# Altium PCB EMI_EMC_PCB1.PcbDoc
Units mil, origin at the board's own origin, x right, y up, seen from the top; angles counter-clockwise.
Board outline 5875 x 3875 mil, 2 copper layers (Top Layer, Bottom Layer); 43 components, 31 nets, 131 pads, 0 vias.
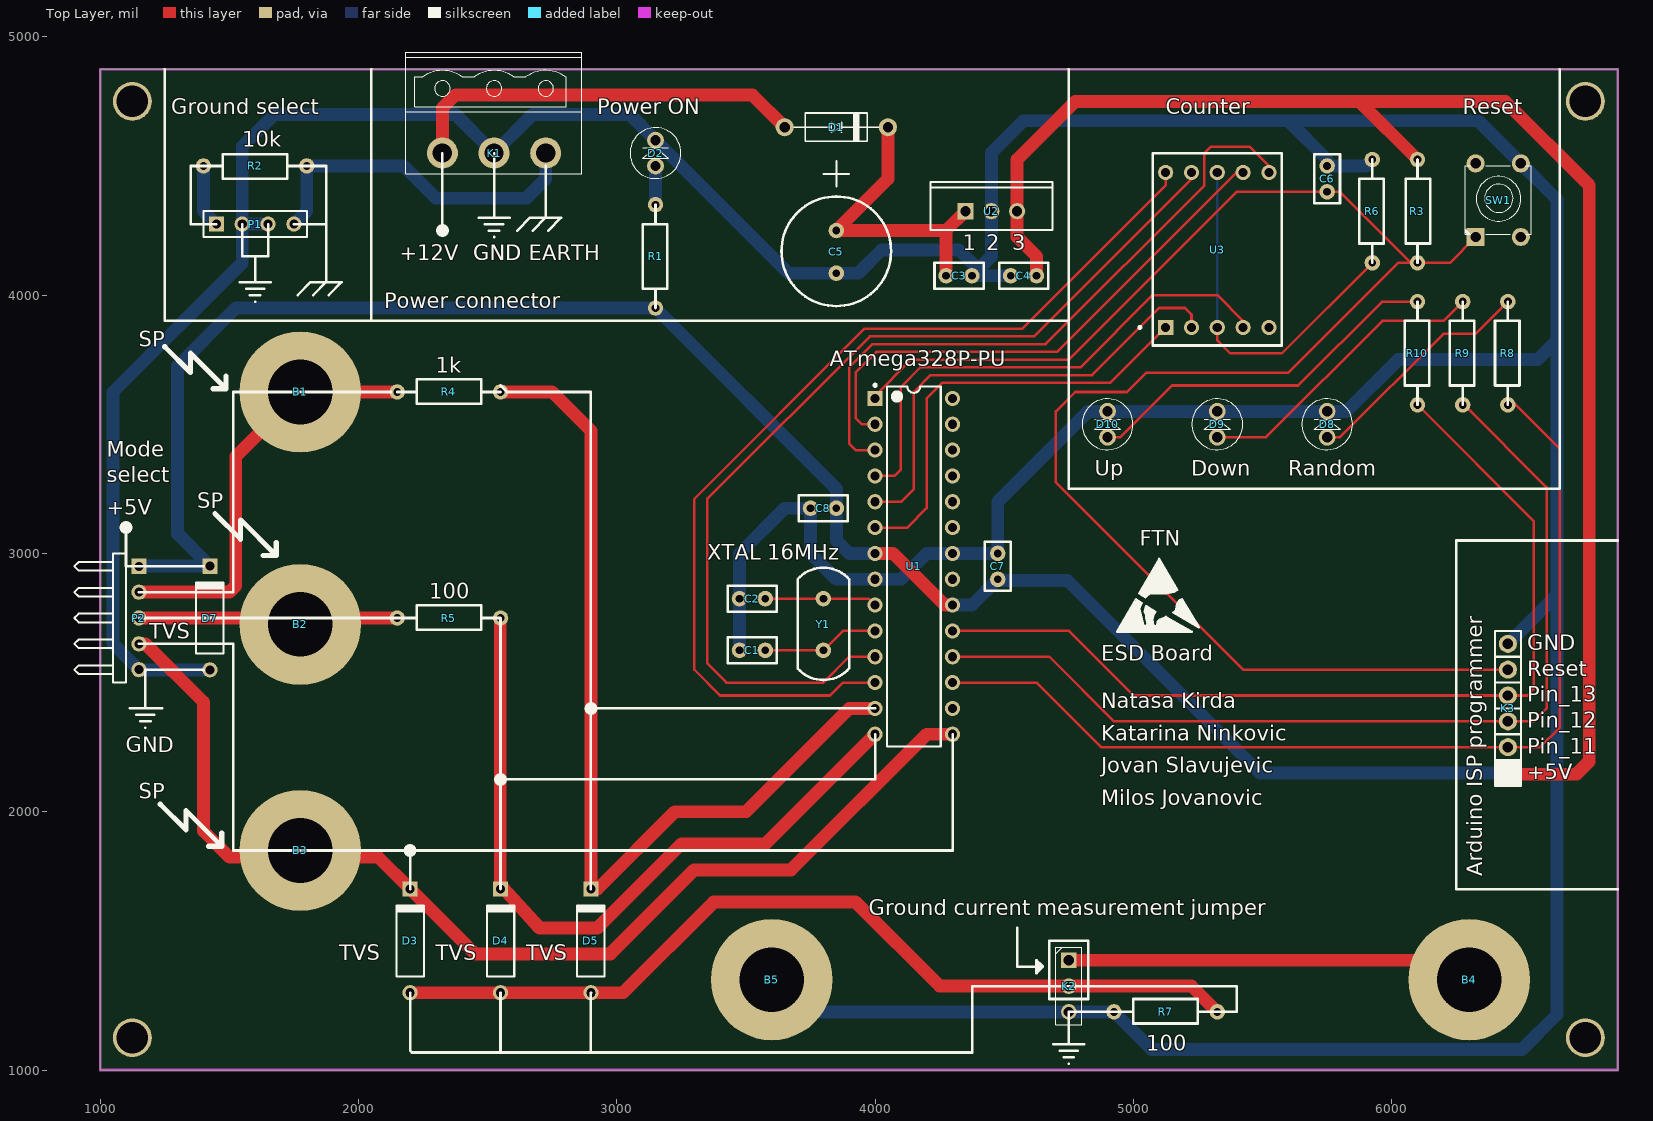
[diagram p0: Top Layer view]
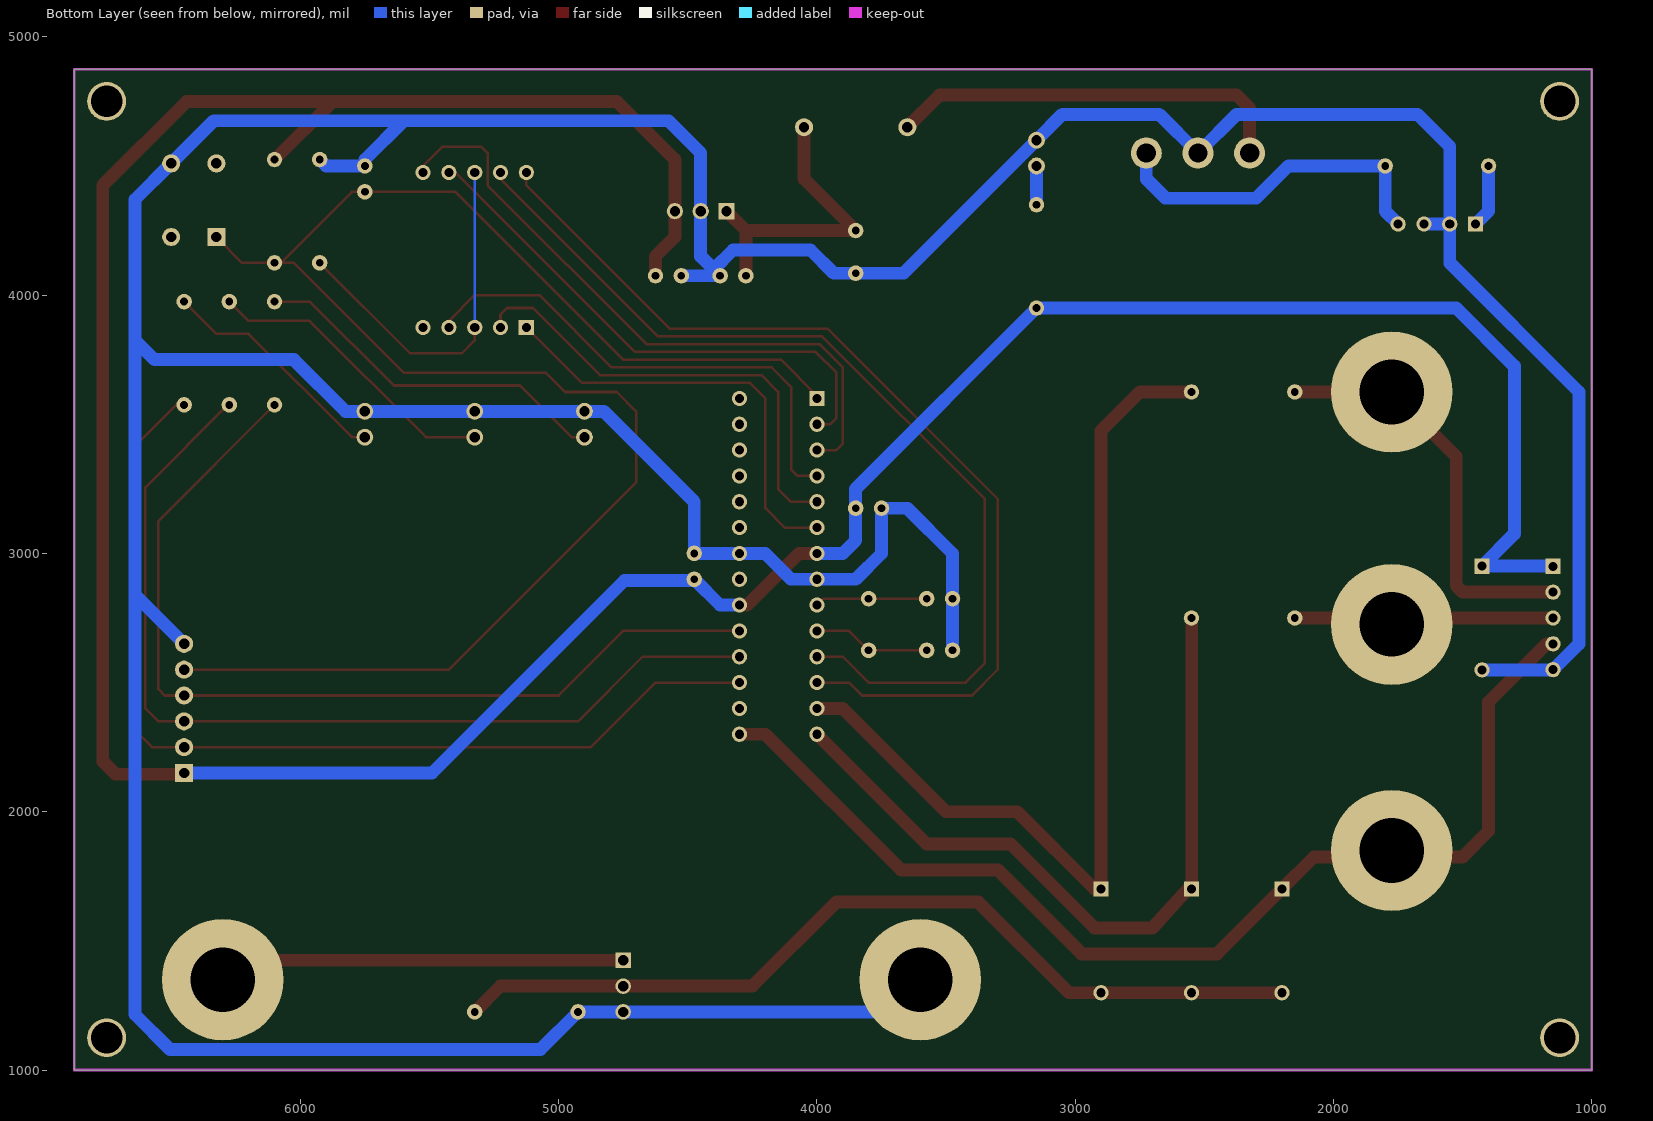
[diagram p1: Bottom Layer view, seen from below]
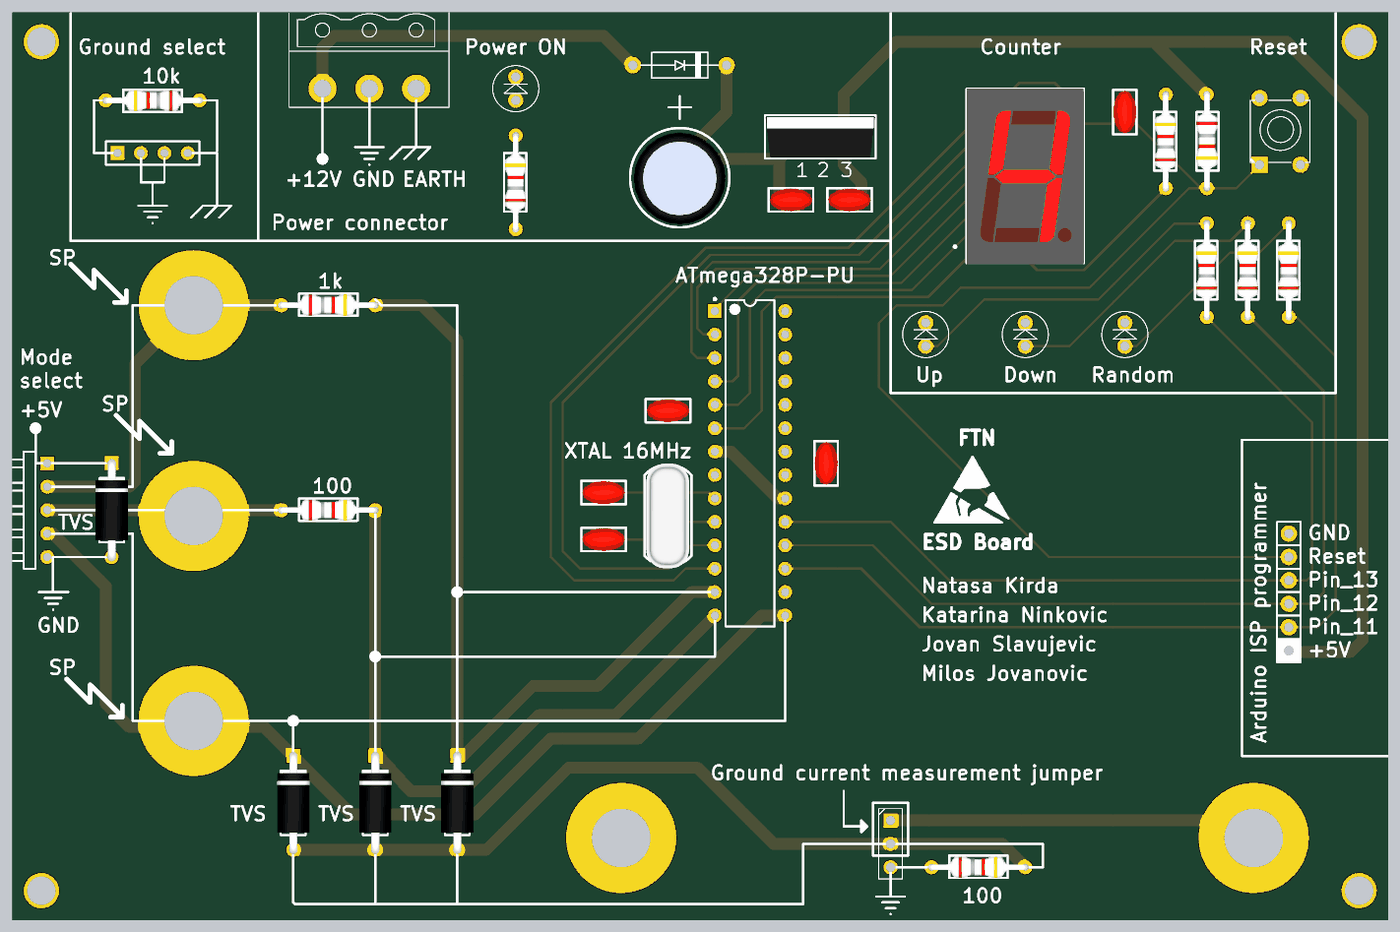
[diagram p2: 3D render of the assembled board from above, using the file's embedded part models]

## Layer stack, top to bottom
Top Solder: solder mask 0.4, Solder Resist, Dk 3.5
Top Layer: signal copper 1.4
Dielectric 1: dielectric 12.6, FR-4, Dk 4.8
Bottom Layer: signal copper 1.4
Bottom Solder: solder mask 0.4, Solder Resist, Dk 3.5

## Board outline
1000,1000 1000,4875 6875,4875 6875,1000

## Design rules (kind name [scope] priority, off if disabled: settings)
Clearance [All] p1: gap=10 ignorepadtopadclearanceinfootprint=FALSE except(0: Arc-Hole Track-Hole SMDPad-Hole THPad-Hole Via-Hole Fill-Hole Poly-Hole Region-Hole Text-Hole)
PolygonConnect [All] p1: connectstyle=Relief reliefconductorwidth=30 reliefentries=4 polygonreliefangle="90 Angle" airgapwidth=30
RoutingVias [All] p1: holewidth=28 width=50 viastyle="Through Hole" minholewidth=28 minwidth=50 maxholewidth=28 maxwidth=50
SolderMaskExpansion [All] p1: expansion=4
Width [All] p1: maxlimit=50 minlimit=10 preferedwidth=10 minimp=50.000000 maximp=50.000000 favimp=50.000000
30 further rules are at their usual default settings.

## Components (designator, comment, footprint, x,y, rotation, side; value= is the part's Value field where it differs from the comment)
B1 "SP" "Buksna 4mm" 1775,3625 r0 top
B2 "SP" "Buksna 4mm" 1775,2725 r0 top
B3 "SP" "Buksna 4mm" 1775,1850 r0 top
B4 "" "Buksna 4mm" 6300,1350 r0 top
B5 "" "Buksna 4mm" 3600,1350 r0 top
C1 "" Cap_100mil 3625,2625 r180 top value="22 pF"
C2 "" Cap_100mil 3625,2825 r180 top value="22 pF"
C3 "" Cap_100mil 4225,4075 r0 top value="0,33 uF"
C4 "" Cap_100mil 4675,4075 r180 top value="0,1 uF"
C5 "" "Cap Pol 1000 uF" 3850,4249.72 r270 top value="470 uF"
C6 "" Cap_100mil 5750,4350 r90 top value="100 pF"
C7 "" Cap_100mil 4475,3050 r270 top value=100n
C8 "" Cap_100mil 3700,3175 r0 top value=100n
D1 "" 1N400X 3650,4650 r0 top
D2 "Power ON" LED-5MM-GREEN 3150,4500 r90 top
D3 "TVS" "TVS DO - 7" 2200,1300 r90 top
D4 "TVS" "TVS DO - 7" 2550,1300 r90 top
D5 "TVS" "TVS DO - 7" 2900,1300 r90 top
D7 "TVS" "TVS DO - 7" 1425,2550 r90 top
D8 "Random" LED-5MM-RED 5750,3450 r90 top
D9 "Down" LED-5MM-RED 5325,3450 r90 top
D10 "Up" LED-5MM-RED 4900,3450 r90 top
FTN "ESD Board" ESDSILK 5100,2980 r0 top
K1 "Power connector" "Header for power" 2325,4550 r270 top
K2 "Ground current measurement jumper" JMPR3-CLOSED-12 4750,1425 r270 top
K3 "Arduino ISP programmer" HEADER-1X6 6450,2150 r180 top
P1 "Ground select" HDR1X4 1450,4275 r0 top
P2 "Mode" HDR1X5H 1150,2950 r270 top
R1 "" "Res_axial 0.4" 3150,3950 r90 top value=1k
R2 "10k" "Res_axial 0.4" 1800,4500 r180 top
R3 "" "Res_axial 0.4" 6100,4525 r270 top value=1k
R4 "1k" "Res_axial 0.4" 2150,3625 r0 top
R5 "100" "Res_axial 0.4" 2150,2750 r0 top
R6 "" "Res_axial 0.4" 5925,4125 r90 top value=470
R7 "" "Res_axial 0.4" 4925,1225 r0 top value=100
R8 "" "Res_axial 0.4" 6450,3575 r90 top value=1k
R9 "" "Res_axial 0.4" 6275,3575 r90 top value=1k
R10 "" "Res_axial 0.4" 6100,3575 r90 top value=1k
SW1 "Reset" SW-PB-RED-ROUND4 6325,4225 r90 top
U1 "ATmega328P-PU" 28P3 4150,2950 r0 top
U2 "" TO220 4450,4325 r0 top
U3 "Counter" "7-segment disp" 5125,3875 r0 top
Y1 "XTAL 16MHz" xtal 3750,2625 r90 top

## Footprints (in the part's own frame and the unit in brackets; to place one, negate y for a bottom-side part, rotate by r counter-clockwise, add the part's x,y. Pads: shape width x height; smd on the part's side, far side on the other; paste and mask are expansions set on the pad)
1N400X [mil]
  round 70 hole 40: A(0,0) K(400,0)
  silkscreen extent 35,-55 365,55, body extent -14,-56 416,56, height 116
"7-segment disp" [mm]
  rect 1.5x1.5 hole 0.9: 1(0,0)
  round 1.5 hole 0.9: 2(2.54,0) 3(5.08,0) 4(7.62,0) 5(10.16,0) 6(10.16,15.24) 7(7.62,15.24) 8(5.08,15.24) 9(2.54,15.24) 10(0,15.24)
  silkscreen extent -2.66,-1.78 11.43,17.14, body extent -1.27,-1.9 11.43,17.14, height 8
28P3 [mm] "DIP, 28-Leads, Row Spacing 7.62mm, Pitch 2.54mm, Body 34.67x7.3mm"
  rect 1.5x1.5 hole 0.9: 1(-3.81,16.51)
  round 1.5 hole 0.9: 2(-3.81,13.97) 3(-3.81,11.43) 4(-3.81,8.89) 5(-3.81,6.35) 6(-3.81,3.81) 7(-3.81,1.27) 8(-3.81,-1.27) 9(-3.81,-3.81) 10(-3.81,-6.35) 11(-3.81,-8.89) 12(-3.81,-11.43) 13(-3.81,-13.97) 14(-3.81,-16.51) 15(3.81,-16.51) 16(3.81,-13.97) 17(3.81,-11.43) 18(3.81,-8.89) 19(3.81,-6.35) 20(3.81,-3.81) 21(3.81,-1.27) 22(3.81,1.27) 23(3.81,3.81) 24(3.81,6.35) 25(3.81,8.89) 26(3.81,11.43) 27(3.81,13.97) 28(3.81,16.51)
  silkscreen extent -3.93,-17.7 2.65,17.93, body extent -3.6,-17.65 3.6,17.65, height 4.58
"Buksna 4mm" [mil] "Buksna za bananu od 4mm"
  round 470 hole 250: 1(0,0)
"Cap Pol 1000 uF" [mil]
  round 60 hole 30: 1(-0.28,0) 2(165,0)
  silkscreen extent -269,-212 292,212, body extent -114,-197 280,197, height 787
Cap_100mil [mil]
  round 60 hole 30: 1(50,0) 2(150,0)
  silkscreen extent 5,-50 195,50, body extent 7,-49 193,49, height 242
ESDSILK [mil]
  silkscreen extent -164,-283 154,0
HDR1X4 [mm] "Connector; Header; 4 Position"
  rect 1.5x1.5 hole 0.9: 1(0,0)
  round 1.5 hole 0.9: 2(2.54,0) 3(5.08,0) 4(7.62,0)
  silkscreen extent -1.27,-1.27 8.89,1.27
HDR1X5H [mm] "Connector; Header; 5 Position; Right Angle"
  rect 1.5x1.5 hole 0.9: 1(0,0)
  round 1.5 hole 0.9: 2(2.54,0) 3(5.08,0) 4(7.62,0) 5(10.16,0)
  silkscreen extent -1.27,-6.35 11.43,-1.27
"Header for power" [mil]
  round 120 hole 75: 1(0,400) 2(0,200) 3(0,0)
  silkscreen extent -390,-142 80,540
HEADER-1X6 [mil]
  rect 70x70 hole 40: 1(0,0)
  round 70 hole 40: 2(0,-100) 3(0,-200) 4(0,-300) 5(0,-400) 6(0,-500)
  silkscreen extent -50,-550 50,50, body extent -50,-550 50,50, height 470
JMPR3-CLOSED-12 [mil]
  rect 60x60 hole 40: 1(0,0)
  round 60 hole 40: 2(100,0) 3(200,0)
  silkscreen extent -50,-50 250,50, body extent -52,-50 250,50, height 300
LED-5MM-GREEN [mil]
  round 65 hole 40: A(0,0) K(100,0)
  silkscreen extent -48,-98 148,98, body extent -54,-105 155,105, height 370
LED-5MM-RED [mil]
  round 65 hole 40: A(0,0) K(100,0)
  silkscreen extent -48,-98 148,98, body extent -54,-105 155,105, height 370
"Res_axial 0.4" [mil]
  round 60 hole 30: 1(400,0) 2(0,0)
  silkscreen extent 0,-45 400,50, body extent -14,-45 410,46, height 94
SW-PB-RED-ROUND4 [mil]
  rect 70x70 hole 40: 1(0,0)
  round 70 hole 40: 2(285,-175) 3(0,-175) 4(285,0)
  silkscreen extent 10,-215 275,40, body extent -6,-216 291,40, height 417
TO220 [mm]
  rect 1.6x1.6 hole 1: 1(-2.54,0)
  round 1.6 hole 1: 2(0,0) 3(2.54,0)
  silkscreen extent -6,-1.85 6,2.85, body extent -5.94,-1.75 5.94,2.65, height 19.11
"TVS DO - 7" [mm]
  round 1.5 hole 0.9: 1(-0.02,0)
  rect 1.5x1.5 hole 0.9: 2(10.18,0)
  silkscreen extent 1.58,-1.35 8.68,1.35, body extent -0.44,-1.78 10.6,1.74, height 3.76
xtal [mil] "oscilator"
  round 60 hole 30: 1(0,-50) 2(200,-50)
  silkscreen extent -115,-150 320,50, body extent -123,-140 323,43, height 138

## Part data
B1 B2 B3 B4 B5: library part Buksna
C1 C2 C3 C4 C6 C7 C8: library part Cap
C5: library part Cap_pol
D1: library part 1N4001, "1N4001"
D2: library part LED-GREEN-5MM, "LED-GREEN-5MM"
D3 D4 D5 D7: library part "TVS diode", Part name="BZV04 5V8"
D8 D9 D10: library part LED-RED-5MM, "LED-RED-5MM"
K2: library part JMPR3-12, "JMPR3", Manufacturer="Sullins Connector Solutions", Manufacturer Part Number=PBC36SAAN, Supplier Part Number 1=S1011E-36-ND, REEL="Closed 1-2", Supplier 1=Digi-Key
K3: library part HEADER-1X6, Supplier Part Number 1=S1011E-36-ND, Supplier 1=Digi-Key
P1: library part "Header 4", "Header, 4-Pin", LatestRevisionDate=17-Jul-2002, LatestRevisionNote="Re-released for DXP Platform.", Publisher="Altium Limited"
P2: library part "Header 5H", "Header, 5-Pin, Right Angle", LatestRevisionDate=17-Jul-2002, LatestRevisionNote="Re-released for DXP Platform.", Publisher="Altium Limited"
R1 R2 R3 R4 R5 R6 R7 R8 R9 R10: library part Res_axial0.4
SW1: library part SW-PB-RED, "SW-D6-R / SW-DS-S / SW-14X14 / SW-7X7"
U1: "8-bit AVR Microcontroller, 32KB Flash, 1KB EEPROM, 2KB SRAM, 28-pin PDIP, Industrial Grade (-40°C to 85°C)", Supplier Part Number 1=ATMEGA328P-PU-ND, ComponentLink1Description="Manufacturer Link", ComponentLink1URL=http://www.atmel.com/products/avr/default.asp?, ComponentLink2Description="ATmega48A/48PA/88A/88PA/168A/168PA/328/328P Datasheet", ComponentLink2URL=http://www.atmel.com/dyn/resources/prod_documents/8271.pdf, ComponentLink3Description="ATmega48A/48PA/88A/88PA/168A/168PA/328/328P Summary", ComponentLink3URL=http://www.atmel.com/dyn/resources/prod_documents/8271S.pdf, ComponentLink4Description="Atmel.com Home", ComponentLink4URL=http://www.atmel.com, DatasheetVersion="revA, Jan-2010", PackageDescription="28-lead (0.300\"/7.62mm Wide) Plastic Dual Inline Package (PDIP)", PackageReference=28P3, PackageVersion="revB, Sep-2001", Published=1-Apr-2010, Publisher="Altium Limited", Supplier 1=Digi-Key, Supplier 2=Farnell, Supplier 3=Mouser, Supplier Part Number 2=1715487, Supplier Part Number 3=556-ATMEGA328P-PU
U2: library part TO220
U3: library part 7-segment
Y1: library part XTAL

## Free pads (board coordinates)
  round 150 hole 122: M1(1125,1125) M1(1125,4750) M1(6750,1125) M1(6750,4750)

## Nets (pads, with @x,y where several pads share a name; then routed paths per layer and width w, separated by ;. In a path a pad name is that pad's centre, name@x,y a point inside that pad or via, vN(x,y) a via of type N, cw(c..) or ccw(c..) an arc to the next point about the centre after c; other vN are vias at no path point)
"+5 V": C4.1 C7.2 C8.2 D7.2 K3.1 P2.1 R1.2 R3.2 U1.7 U1.20 U2.3 | length 13100
  Top Layer w50: U1.7 4070,3000 4270,2800 U1.20 ; C4.1 4625,4150 4550,4225 U2.3 4550,4525 4775,4750 5875,4750 ; R3.2 5875,4750 ; K3.1 6455,2145 6715,2145 6765,2195 6765,4425 6440,4750 5875,4750
  Bottom Layer w50: P2.1 1150.79,2950.79 D7.2 1300,3075.79 1300,3725 1525,3950 R1.2 3850,3250 C8.2 3850,3050 3900,3000 U1.7 ; U1.20 4375,2800 C7.2 4480,2895 4745,2895 5490,2150 K3.1
"+12 V": D1.A K1.3 | length 1572.5
  Top Layer w50: K1.3 2325,4725 2375,4775 3525,4775 D1.A
EARTH: K1.1 P1.4 R2.2 | length 1353.6
  Bottom Layer w50: P1.4 1800,4325 R2.2 2175,4500 2300,4375 2650,4375 2725,4450 K1.1
GND: B5.1 C1.2 C2.2 C3.2 C4.2 C5.2 C6.2 C7.1 C8.1 D2.K D7.1 D8.K D9.K D10.K K1.2 K2.3 K3.6 P1.2 P1.3 P2.5 R6.1 R7.2 SW1.2 U1.8 U1.22 U2.2 | length 20405.5
  Bottom Layer w50: D7.1 1150.79,2549.21 P2.5 1050,2650 1050,3625 1550,4125 P1.2 ; P1.3 P1.2 ; C1.2 C2.2 3475,3000 3650,3175 C8.1 3750,3000 3850,2900 U1.8 4100,2900 4200,3000 U1.22 C7.1 4475,3200 4825,3550 D10.K D9.K D8.K 5825,3550 6025,3750 6565,3750 6640,3825 ; B5.1 3725,1225 K2.3 R7.2 5070,1080 6505,1080 6640,1215 6640,2840 ; C3.2 4425,4075 ; C4.2 4425,4075 ; R6.1 5900,4500 C6.2 5750,4525 5600,4675 ; K3.6 6640,2840 ; P1.2 1550,4575 1675,4700 2375,4700 K1.2 2675,4700 3050,4700 D2.K 3665.28,4084.72 C5.2 3934.72,4084.72 4025,4175 4325,4175 4400,4100 ; 4400,4100 4425,4075 ; 4400,4100 4450,4150 U2.2 4450,4550 4575,4675 5600,4675 ; 5600,4675 6335,4675 SW1.2 6640,4370 6640,3825 ; 6640,2840 6640,3825
NetB4_1: B4.1 K2.1 | length 1581.1
  Top Layer w50: K2.1 6225,1425 B4.1
NetC1_1: C1.1 U1.10 Y1.1 | length 456.1
  Top Layer w10: C1.1 Y1.1 3875,2700 U1.10
NetC2_1: C2.1 U1.9 Y1.2 | length 435.4
  Top Layer w10: C2.1 Y1.2 3975,2825 U1.9
NetC3_1: C3.1 C5.1 D1.K U2.1 | length 1188.9
  Top Layer w50: D1.K 4050,4450 C5.1 4275,4250 ; C3.1 4275,4250 ; U2.1 4275,4250
NetD2_A: D2.A R1.1 | length 150
  Bottom Layer w50: R1.1 D2.A
NetD3_1: D3.1 D4.1 D5.1 K2.2 R7.1 | length 3446.3
  Top Layer w50: D3.1 D4.1 D5.1 3024.21,1299.21 3375,1650 3925,1650 4250,1325 K2.2 5225,1325 R7.1
NetD8_A: D8.A R8.1 | length 939.4
  Top Layer w10: D8.A 5800,3450 6200,3850 6325,3850 R8.1 R8.1@6465.5,3990.5
NetD9_A: D9.A R9.1 | length 1174
  Top Layer w10: D9.A 5514,3450 5964,3900 6200,3900 6274,3974 R9.1@6282,3974
NetD10_A: D10.A R10.1 | length 1417
  Top Layer w10: D10.A 4950,3450 5150,3650 5638,3650 5962,3974 R10.1@6100,3974
NetP1_1: P1.1 R2.1 | length 245.7
  Bottom Layer w50: R2.1 1400,4325 P1.1
NetR6_2: R6.2 U3.3 U3.8 | length 1415.7
  Top Layer w10: U3.3 5325,3825 5375,3775 5575,3775 R6.2
  Bottom Layer w10: U3.3 U3.8
NetU1_2: U1.2 U3.7 | length 2081.4
  Top Layer w10: U1.2 3950,3500 3925,3525 3925,3700 4005,3780 4705,3780 5400,4475 U3.7
NetU1_3: U1.3 U3.6 | length 2513.8
  Top Layer w10: U1.3 3925,3400 3900,3425 3900,3720 3990,3810 4660,3810 5275,4425 5275,4550 5300,4575 5450,4575 5525,4500 U3.6
NetU1_4: U1.4 U3.4 | length 1968.8
  Top Layer w10: U1.4 4075,3300 4100,3325 4100,3645 4175,3720 4795,3720 5075,4000 5325,4000 5425,3900 U3.4
NetU1_5: U1.5 U3.2 | length 1815.7
  Top Layer w10: U1.5 4100,3200 4150,3250 4150,3625 4215,3690 4840,3690 5100,3950 5200,3950 5225,3925 U3.2
NetU1_6: U1.6 U3.1 | length 1695
  Top Layer w10: U1.6 4125,3100 4200,3175 4200,3600 4260,3660 4910,3660 U3.1
NetU1_11: U1.11 U3.9 | length 3771.1
  Top Layer w10: U1.11 3900,2600 3800,2500 3425,2500 3350,2575 3350,3210 3980,3840 4615,3840 5225,4450 U3.9
NetU1_12: U1.12 U3.10 | length 3800.4
  Top Layer w10: U1.12 3875,2500 3825,2450 3400,2450 3300,2550 3300,3210 3960,3870 4570,3870 5125,4425 U3.10
pin11_ISP: K3.2 R8.2 U1.17 | length 3835.6
  Top Layer w10: U1.17 4625,2500 4875,2250 K3.2 6575,2250 6650,2325 6650,3406 6481,3575 R8.2
pin12_ISP: K3.3 R9.2 U1.18 | length 3735.6
  Top Layer w10: U1.18 4675,2600 4925,2350 6550,2350 6600,2400 6600,3256 R9.2@6278,3578
pin13_ISP: K3.4 R10.2 U1.19 | length 3667.9
  Top Layer w10: U1.19 4750,2700 5000,2450 K3.4 6525,2450 6550,2475 6550,3125 6101,3574 R10.2@6082,3574
reset: C6.1 K3.5 R3.1 SW1.1 U1.1 | length 6756
  Top Layer w10: U1.1 4000,3610 4140,3750 4750,3750 5400,4400 C6.1 5800,4400 R3.1@6075,4125 ; SW1.1 6225,4125 R3.1 R3.1@6075,4125 ; K3.5 5425,2550 4700,3275 4700,3550 4775,3625 4975,3625 5050,3700 5600,3700 6025,4125 R3.1@6075,4125
SW1: D5.2 R4.1 U1.13 | length 3576
  Top Layer w50: R4.1 2750,3625 2900,3475 D5.2 2925.79,1700.79 3225,2000 3500,2000 3900,2400 U1.13
SW1_in: B1.1 P2.2 R4.2 | length 1613.9
  Top Layer w50: P2.2 1500,2850 1525,2875 1525,3375 B1.1 R4.2
SW2: D4.2 R5.1 U1.14 | length 2860.3
  Top Layer w50: R5.1@2549,2742 2549,1717.79 2557.91,1707.94 2700.79,1550 2925,1550 3250,1875 3575,1875 U1.14
SW2_in: B2.1 P2.3 R5.2 | length 996
  Top Layer w50: P2.3 R5.2@2146,2750
SW3: B3.1 D3.2 P2.4 U1.15 | length 4312.7
  Top Layer w50: P2.4 1175,2650 1400,2425 1400,1925 1500,1825 1750,1825 B3.1 1800,1825 2075.79,1825 D3.2 2450.79,1450 2975,1450 3300,1775 3675,1775 4200,2300 U1.15
pads on no net: SW1.3 SW1.4 U1.16 U1.21 U1.23 U1.24 U1.25 U1.26 U1.27 U1.28 U3.5

## Keep-outs
Keep-Out Layer:
  the board outline again, w10

## Silkscreen, mask and mechanical layers (free items; w line width, h text height)
Top Overlay:
  lines w0: 4376,1324 4377,1325
  lines w10: 1100,3100 1100,2950 1400,2950 ; 1115,2400 1175,2400 ; 1140,2375 1210,2375 ; 1150,2650 1450,2650 1515,2650 1515,2135 1515,2085 1515,2075 1515,1850 1530,1850 1804,1850 1550,1850 ; 1150,2750 1775,2750 2150,2750 ; 1150,2850 1500,2850 1515,2850 1515,3250 1515,3625 1775,3625 ; 1155,2350 1195,2350 ; 1240,2400 1175,2400 ; 1250,4875 1250,3900 3000,3900 3500,3900 4750,3900 ; 1400,2548.43 1398.43,2550 1175,2550 1175,2400 ; 1400,4500 1350,4500 1350,4275 1450,4275 ; 1540,4050 1600,4050 ; 1550,4275 1550,4150 1650,4150 1650,4275 ; 1565,4025 1635,4025 ; 1580,4000 1620,4000 ; 1600,4150 1600,4050 ; 1660,4050 1600,4050 ; 1750,3625 2125,3625 ; 1750,4275 1875,4275 ; 1765,4000 1815,4050 1935,4050 1885,4000 ; 1800,1850 2200,1850 ; 1800,4500 1875,4500 1875,4275 ; 1825,4000 1875,4050 1875,4250 1875,4275 ; 2050,3900 2050,4875 ; 2200,1299.21 2200,1075 2207,1068 2275,1068 ; 2200,1300 2200.79,1299.21 ; 2200,1700.79 2200,1850 ; 2261,1068 4377,1068 4377,1325 4750,1325 5400,1325 5400,1225 5325,1225 ; 2325,4250 2325,4550 ; 2525,4550 2525,4300 ; 2550,1075 2550,1299.21 ; 2550,1700.79 2550,2750 ; 2550,2125 4000,2125 4000,2300 ; 2550,3650 2575,3625 2900,3625 2900,1700.79 ; 2615,4250 2665,4300 2725,4300 ; 2675,4250 2725,4300 ; 2675,4300 2785,4300 2735,4250 ; 2725,4500 2725,4300 ; 2900,1068 2900,1299.21 2900.79,1300 ; 2900,2400 4000,2400 ; 4300,2300 4300,1850 2200,1850 ; 4550,1550 4550,1400 4650,1400 ; 4629,1387 4630,1388 4630,1416 ; 4690,1100 4750,1100 ; 4715,1075 4785,1075 ; 4730,1050 4770,1050 ; 4750,4875 4750,3250 6650,3250 6650,4875 ; 4810,1100 4750,1100 ; 4925,1225 4750,1225 4750,1100 ; 6875,1700 6400,1700 6250,1700 6250,3050 6875,3050 ; 2525,4300 2465,4300 2525,4300 ; 2525,4300 2585,4300 2525,4300 ; 4625,1400 4637.5,1387.5 ; 4625,1400 4637.5,1412.5 ; 4625,1400 4637.5,1387.5 ; 4637.5,1387.5 4637.5,1412.5 ; 4637.5,1387.5 4637.5,1412.5 ; 4650,1400 4625,1375 4625,1425 4650,1400 ; 1175,2325 1175,2325 ; 1600,3975 1600,3975 ; 2490,4275 2560,4275 2490,4275 ; 2505,4250 2545,4250 2505,4250 ; 2525,4225 2525,4225 ; 4675,1275 4825,1275 4825,1500 4675,1500 4675,1275 ; 4750,1025 4750,1025
  lines w20: 1233,2029 1333,1929 1333,2004 1470.5,1866.5 ; 1250,3800 1350,3700 1350,3775 1487.5,3637.5 ; 1420.5,1866.5 1470.5,1866.5 ; 1437.5,3637.5 1487.5,3637.5 ; 1444,3155 1544,3055 1544,3130 1681.5,2992.5 ; 1470.5,1916.5 1470.5,1866.5 ; 1475,3650 1487.5,3637.5 ; 1487.5,3687.5 1487.5,3637.5 ; 1631.5,2992.5 1681.5,2992.5 ; 1681.5,3042.5 1681.5,2992.5
  lines w50: 1100,3100 1100,3100 ; 2200,1850 2200,1850 ; 2325,4250 2325,4250 ; 2550,2125 2550,2125 ; 2900,2400 2900,2400
  text "+12V" at 2160,4135 h60
  text "GND" at 2445,4135 h60
  text "GND" at 2445,4135 h60
  text "EARTH" at 2660,4135 h60
  text "select" at 1025,3275 h60
  text "+5V" at 1025,3150 h60
  text "GND" at 6525,2625 h60
  text "Reset" at 6525,2525 h60
  text "Pin_13" at 6525,2425 h60
  text "Natasa Kirda" at 4875,2400 h60
  text "Pin_12" at 6525,2325 h60
  text "Katarina Ninkovic" at 4875,2275 h60
  text "GND" at 1100,2230 h60
  text "Pin_11" at 6525,2225 h60
  text "Jovan Slavujevic" at 4875,2150 h60
  text "+5V" at 6525,2125 h60
  text "Milos Jovanovic" at 4875,2025 h60
  text "100" at 5050,1075 h60

## Text inside footprints (layer, text, board x,y; h text height)
U2: Top Overlay "2" at 4430.31,4174.41 h59.06; Top Overlay "1" at 4340.16,4174.41 h59.06; Top Overlay "3" at 4530.31,4174.41 h59.06